# Altium PCB gimbalPCB.PcbDoc (part 1 of 2)
Units mil, origin at the board's own origin, x right, y up, seen from the top; angles counter-clockwise.
Board outline 2880 x 3030 mil, 2 copper layers (Top Layer, Bottom Layer); 107 components, 57 nets, 327 pads, 91 vias.
Unrouted connection lines stored in the file: 9.
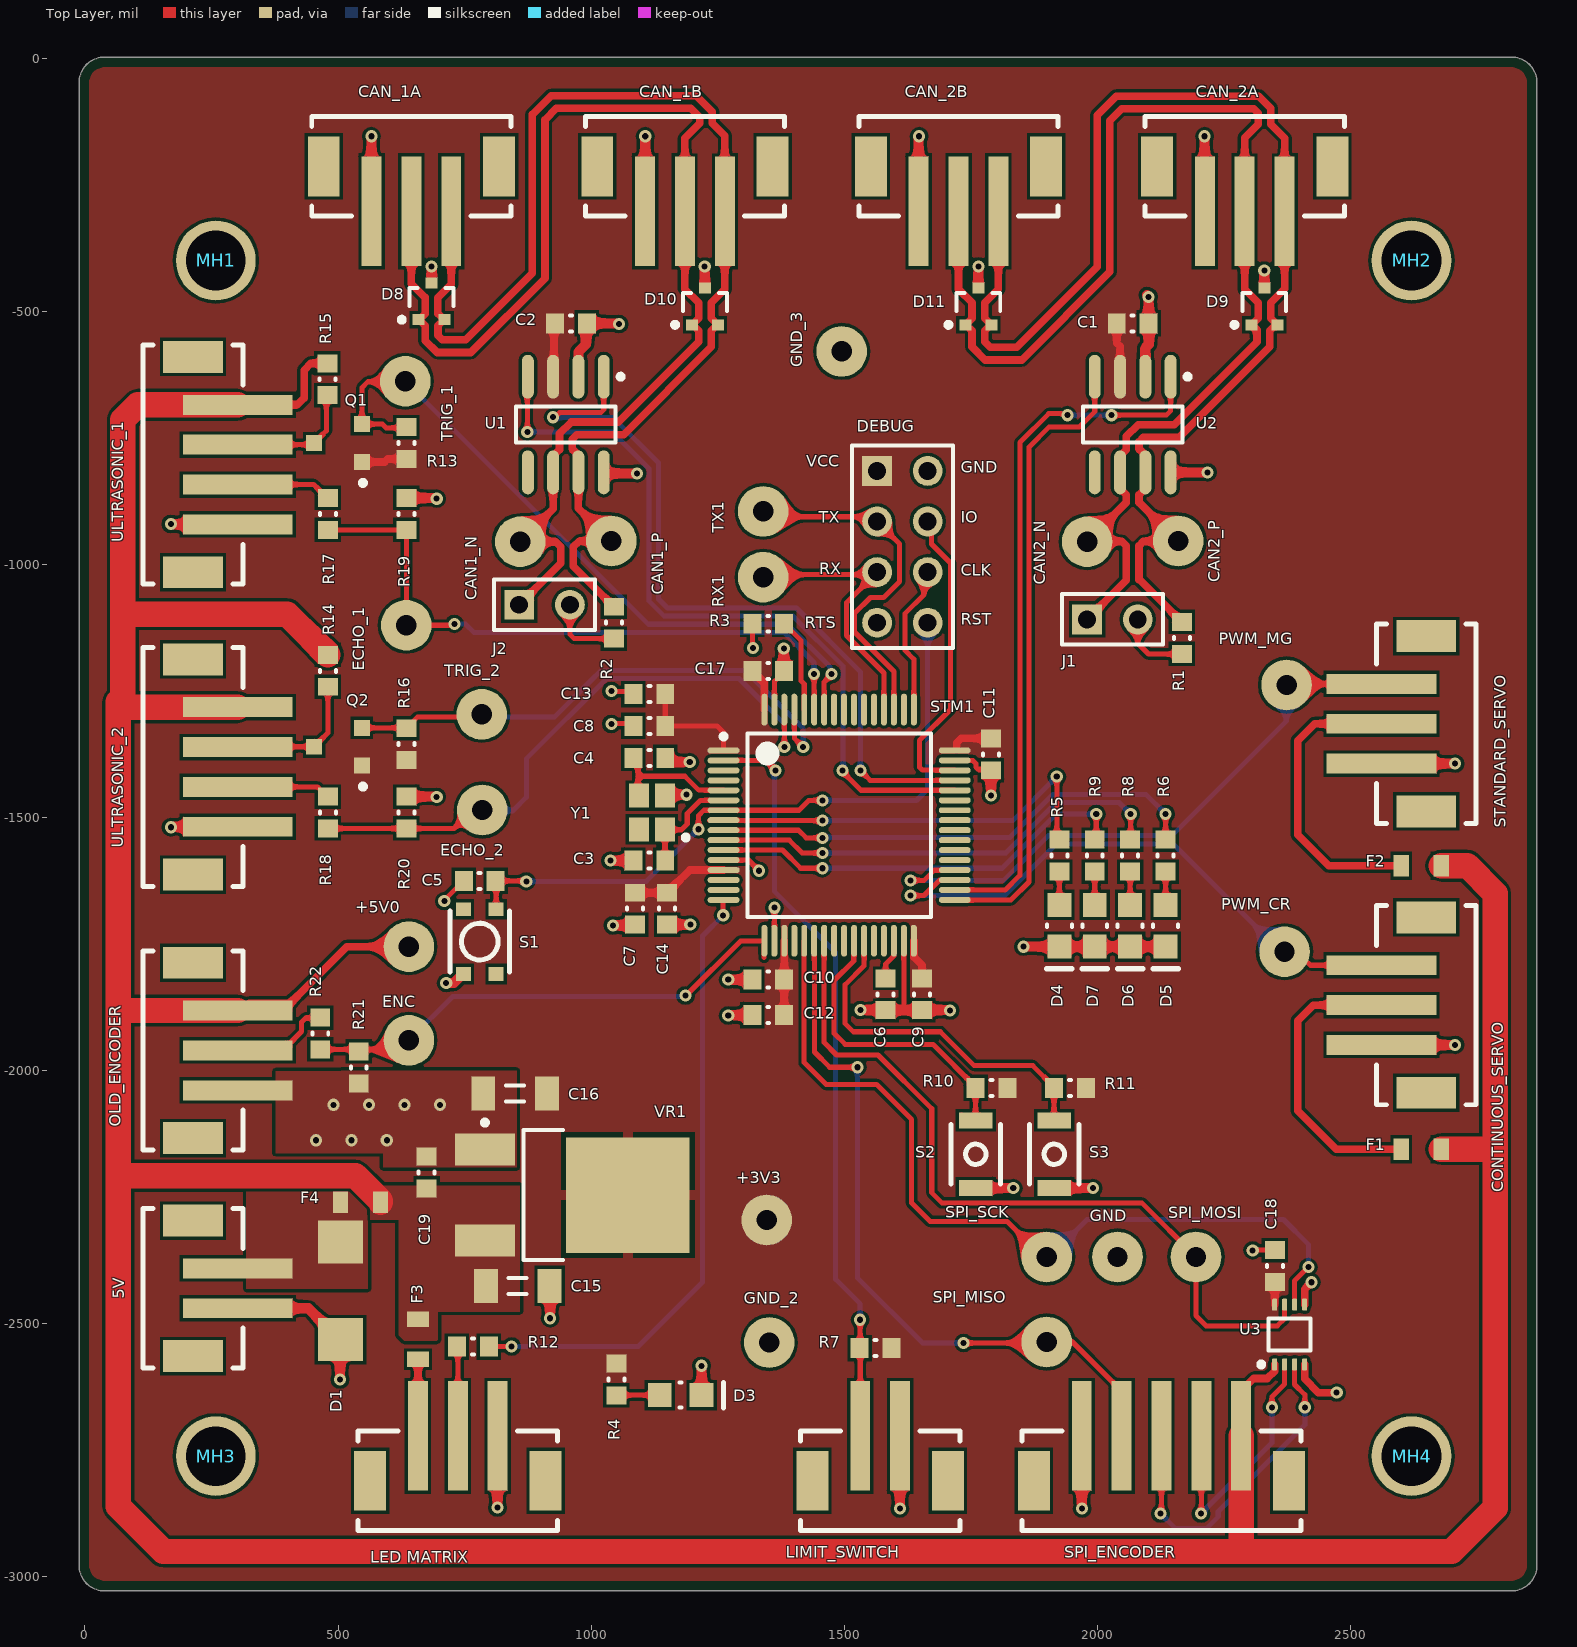
[diagram p0: Top Layer view]
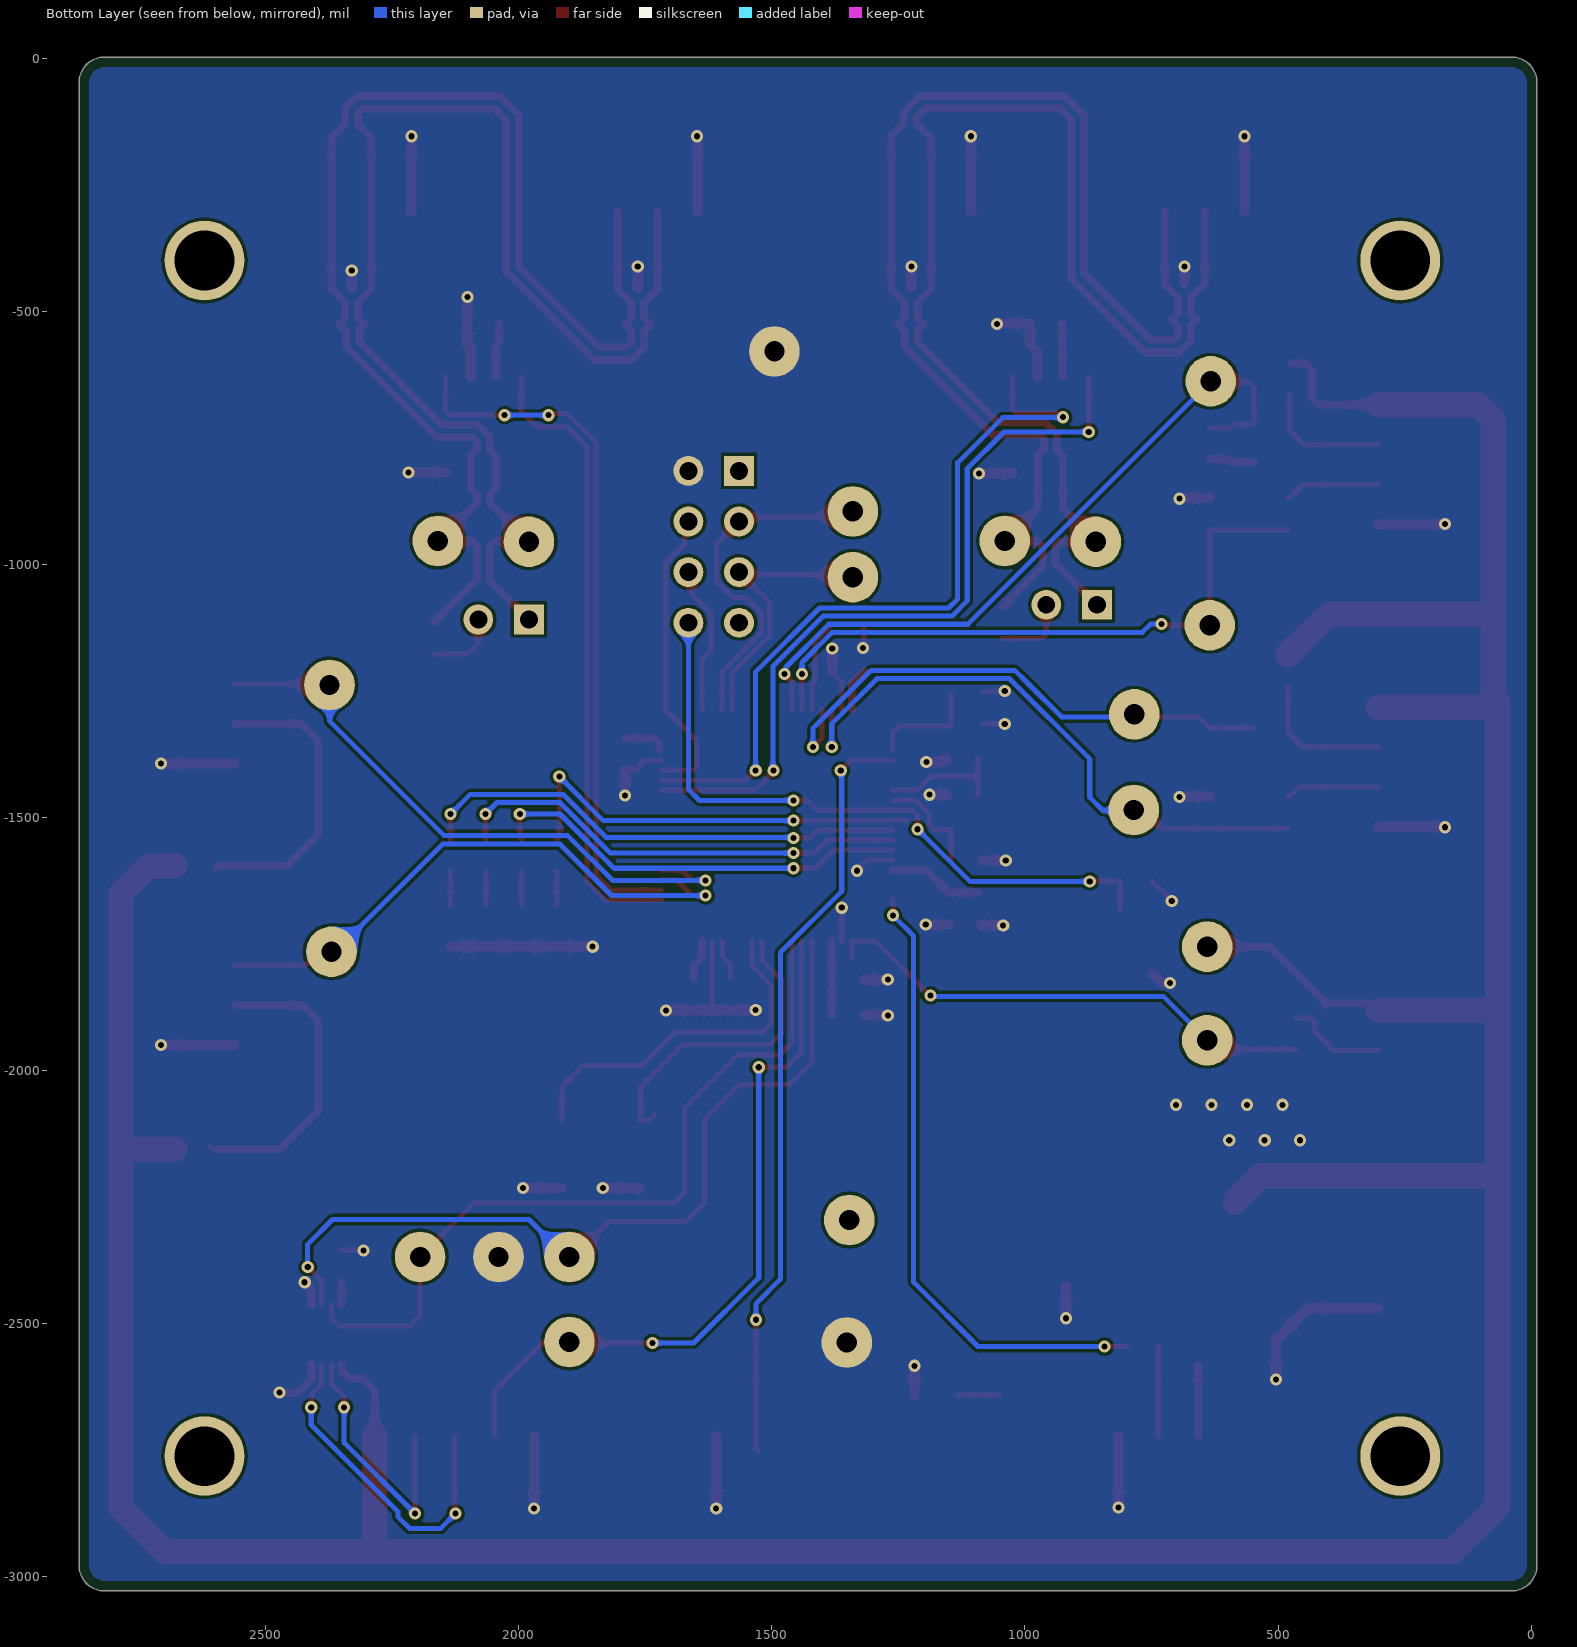
[diagram p1: Bottom Layer view, seen from below]

## Layer stack, top to bottom
Top Solder: solder mask 0.4, Solder Resist, Dk 3.5
Top Layer: signal copper 1.4
Dielectric 1: dielectric 12.6, FR-4, Dk 4.8
Bottom Layer: signal copper 1.4
Bottom Solder: solder mask 0.4, Solder Resist, Dk 3.5

## Board outline
-11.42,-2977.64 ccw(c38.58,-2977.64) 38.58,-3027.64 2818.58,-3027.64 ccw(c2818.58,-2977.64) 2868.58,-2977.64 2868.58,-47.64 ccw(c2818.58,-47.64) 2818.58,2.36 38.58,2.36 ccw(c38.58,-47.64) -11.42,-47.64

## Design rules (kind name [scope] priority, off if disabled: settings)
BoardOutlineClearance [All] p1: gap=20 ignorepadtopadclearanceinfootprint=FALSE
Clearance Clearance_1 [All] p1: gap=6 ignorepadtopadclearanceinfootprint=TRUE
DiffPairsRouting [All] p1: maxlimit=10 minlimit=10 mostfreqgap=10 toplayer_minwidth=15 toplayer_maxwidth=15 toplayer_prefwidth=15 bottomlayer_minwidth=15 bottomlayer_maxwidth=15 bottomlayer_prefwidth=15 maxuncoupledlength=500
HoleSize [All] p1: absolutevalues=TRUE maxlimit=200 minlimit=1 maxpercent=80.000 minpercent=20.000
MinimumSolderMaskSliver [All] p1: minsoldermaskwidth=5
PolygonConnect PolygonConnect_1 [InComponent('VR1') and InNet('+3V3')] p1: connectstyle=Relief reliefconductorwidth=20 reliefentries=4 polygonreliefangle="90 Angle" airgapwidth=10
PolygonConnect [All] p2: connectstyle=Direct reliefconductorwidth=10 reliefentries=4 polygonreliefangle="90 Angle" airgapwidth=10
RoutingVias [All] p1: holewidth=12 width=24 viastyle="Through Hole" minholewidth=12 minwidth=24 maxholewidth=28 maxwidth=50
SilkToSolderMaskClearance [IsPad] p1: minsilkscreentomaskgap=6 clearancetoexposedcopper=TRUE
SolderMaskExpansion [All] p1: expansion=4
Width Width_1 [All] p1: maxlimit=50 minlimit=10 preferedwidth=10 minimp=50.000000 maximp=50.000000 favimp=50.000000
26 further rules are at their usual default settings.

## Classes and differential pairs
component class Sensors: C18 C19 OLD_ENCODER Q1 Q2 R13 R14 R15 R16 R17 R18 R19 R20 R21 R22 SPI_ENCODER SPI_MISO SPI_MOSI SPI_SCK U3 ULTRASONIC_1 ULTRASONIC_2
component class Support: D4 D5 D6 D7 ECHO_1 ECHO_2 ENC GND_2 GND_3 MH1 MH2 MH3 MH4 PWM_CR PWM_MG R5 R6 R8 R9 R10 R11 S2 S3 TRIG_1 TRIG_2
component class POWER: +3V3 +5V0 C15 C16 D3 GND R4 VR1
component class MCU: C3 C4 C5 C6 C7 C8 C9 C10 C11 C12 C13 C14 C17 R3 RX1 S1 STM1 TX1 Y1
component class Connectors: 5V CAN_1A CAN_1B CAN_2A CAN_2B CONTINUOUS_SERVO D1 D8 D9 D10 D11 DEBUG F1 F2 F3 F4 "LED MATRIX" LIMIT_SWITCH R7 R12 STANDARD_SERVO
component class CAN: C1 C2 CAN1_N CAN1_P CAN2_N CAN2_P J1 J2 R1 R2 U1 U2
differential pair CAN2: +CAN2_P -CAN2_N
differential pair CAN1: +CAN1_P -CAN1_N

## Components (designator, comment, footprint, x,y, rotation, side; value= is the part's Value field where it differs from the comment)
5V "CON_2M_SM4" JST-B2B-SM4-TB 115,-2430 r270 top locked
+3V3 "TESTPOINT_LOOP" TESTPOINT_LOOP 1347,-2295 r90 top
+5V0 "TESTPOINT_LOOP" TESTPOINT_LOOP 640,-1755 r90 top
C1 "" CAPC0603(1608)55_N 2070,-523.5 r180 top value="0.1uF 16V"
C2 "" CAPC0603(1608)55_N 960,-523.5 r180 top locked value="0.1uF 16V"
C3 "CAP_15pF_0603" CAPC0603(1608)55_N 1115,-1585 r0 top value=15pF
C4 "CAP_15pF_0603" CAPC0603(1608)55_N 1115,-1382 r180 top value=15pF
C5 "CAP_0.1uF_16V_0603" CAPC0603(1608)55_N 780,-1625 r0 top value=0.1uF
C6 "CAP_4.7uF_0603" CAPC0603(1608)55_N 1582,-1849 r90 top value=4.7uF
C7 "CAP_1uF_16V_0603" CAPC0603(1608)55_N 1087,-1680 r90 top value=1uF
C8 "CAP_0.1uF_16V_0603" CAPC0603(1608)55_N 1115,-1319 r0 top value=0.1uF
C9 "CAP_0.1uF_16V_0603" CAPC0603(1608)55_N 1654,-1849 r90 top value=0.1uF
C10 "CAP_0.1uF_16V_0603" CAPC0603(1608)55_N 1350,-1820 r0 top value=0.1uF
C11 "CAP_0.1uF_16V_0603" CAPC0603(1608)55_N 1790,-1375 r90 top locked value=0.1uF
C12 "CAP_4.7uF_0603" CAPC0603(1608)55_N 1350,-1890 r0 top value=4.7uF
C13 "CAP_0.1uF_16V_0603" CAPC0603(1608)55_N 1115,-1256 r0 top value=0.1uF
C14 "CAP_10nF_0603" CAPC0603(1608)55_N 1150,-1680 r90 top value=10nF
C15 "10uF" CAPC1206(3216) 855,-2425 r180 top
C16 "10uF" CAPC1206(3216) 850,-2045 r0 top
C17 "CAP_0.1uF_16V_0603" CAPC0603(1608)55_N 1350,-1210 r180 top value=0.1uF
C18 "CAP_0.1uF_50V_0603" CAPC0603(1608)55_N 2351,-2386 r270 top value=0.1uF
C19 "CAP_0.1uF_50V_0603" CAPC0603(1608)55_N 675,-2201 r270 top value=0.1uF
CAN1_N "TESTPOINT_LOOP" TESTPOINT_LOOP 860,-955 r0 top
CAN1_P "TESTPOINT_LOOP" TESTPOINT_LOOP 1040,-953.5 r0 top locked
CAN2_N "TESTPOINT_LOOP" TESTPOINT_LOOP 1980,-955 r0 top
CAN2_P "TESTPOINT_LOOP" TESTPOINT_LOOP 2160,-953.5 r0 top locked
CAN_1A "CON_3M_SM4" JST-B3B-SM4-TB 645,-115 r180 top locked
CAN_1B "CON_3M_SM4" JST-B3B-SM4-TB 1185.42,-115 r180 top locked
CAN_2A "CON_3M_SM4" JST-B3B-SM4-TB 2291.26,-115 r180 top locked
CAN_2B "CON_3M_SM4" JST-B3B-SM4-TB 1725.84,-115 r180 top locked
CONTINUOUS_SERVO "CON_3M_SM4" JST-B3B-SM4-TB 2748.43,-1870.42 r90 top locked
D1 "TVS_DIODE_BIDIRECTIONAL" TVS_DIODE_BIDIRECTIONAL 505,-2435 r270 top
D3 "DIO_LED_G" LED_0805_LINE 1177,-2641 r0 top
D4 "DIO_LED_G" LED_0805_LINE 1925,-1713.66 r270 top
D5 "DIO_LED_G" LED_0805_LINE 2135,-1713.66 r270 top
D6 "DIO_LED_G" LED_0805_LINE 2065,-1713.66 r270 top
D7 "DIO_LED_G" LED_0805_LINE 1995,-1713.66 r270 top
D8 "TVS_DIODE_CAN" NXP-SOT323-3 685,-480 r90 top
D9 "TVS_DIODE_CAN" NXP-SOT323-3 2330,-490 r90 top locked
D10 "TVS_DIODE_CAN" NXP-SOT323-3 1225,-490 r90 top locked
D11 "TVS_DIODE_CAN" NXP-SOT323-3 1765,-490 r90 top locked
DEBUG "HEADER 4X2" HEADER_2X4 1565,-815 r270 top locked
ECHO_1 "TESTPOINT_LOOP" TESTPOINT_LOOP 635,-1120 r270 top
ECHO_2 "TESTPOINT_LOOP" TESTPOINT_LOOP 785,-1485 r270 top locked
ENC "TESTPOINT_LOOP" TESTPOINT_LOOP 640,-1940 r270 top
F1 "FUSE_1.5A_0603" FUSE_0603 2640,-2155 r0 top
F2 "FUSE_5A_0603" FUSE_0603 2640,-1595 r0 top
F3 "FUSE_250mA_0603" FUSE_0603 658,-2530.43 r270 top
F4 "FUSE_2A_0603" FUSE_0603 544.57,-2260 r0 top
GND "TESTPOINT_LOOP" TESTPOINT_LOOP 2040,-2368 r0 top
GND_2 "TESTPOINT_LOOP" TESTPOINT_LOOP 1352,-2537 r90 top
GND_3 "TESTPOINT_LOOP" TESTPOINT_LOOP 1495,-579 r90 top
J1 "JUMPER_2" HDR1X2 1980,-1108.5 r0 top
J2 "JUMPER_2" HDR1X2 858,-1079.5 r0 top locked
"LED MATRIX" "CON_3M_SM4" JST-B3B-SM4-TB 736.77,-2908.43 r0 top
LIMIT_SWITCH "CON_2M_SM4" JST-B2B-SM4-TB 1571.14,-2908.43 r0 top
MH1 "MOUNTING_HOLES" MOUNTING_HOLE#1 248.78,-591.42 r0 top locked
MH2 "MOUNTING_HOLES" MOUNTING_HOLE#2 2682.83,-427.05 r0 top locked
MH3 "MOUNTING_HOLES" MOUNTING_HOLE#3 265.51,-2405.39 r0 top locked
MH4 "MOUNTING_HOLES" MOUNTING_HOLE#4 3239.14,-2955.53 r0 top locked
OLD_ENCODER "CON_3M" JST-B3B-SM4-TB 115,-1960 r270 top locked
PWM_CR "TESTPOINT_LOOP" TESTPOINT_LOOP 2370,-1765 r0 top locked
PWM_MG "TESTPOINT_LOOP" TESTPOINT_LOOP 2374,-1238 r0 top
Q1 "NMOS_20V_6A" NMOS_SOT23-3 500,-760 r90 top locked
Q2 "NMOS_20V_6A" NMOS_SOT23-3 500,-1360 r90 top locked
R1 "" RESC0603(1608)_N 2167,-1145 r270 top value=120R
R2 "" RESC0603(1608)_N 1045,-1115 r270 top value=120R
R3 "RES_10K_0603" RESC0603(1608)_N 1350,-1117 r180 top value=10K
R4 "RES_100R_0603" RESC0603(1608)_N 1050,-2610 r90 top value=100R
R5 "RES_100R_0603" RESC0603(1608)_N 1925,-1575 r270 top value=100R
R6 "RES_100R_0603" RESC0603(1608)_N 2135,-1575 r270 top value=100R
R7 "RES_10K_0603" RESC0603(1608)_N 1562,-2548 r0 top value=10K
R8 "RES_100R_0603" RESC0603(1608)_N 2065,-1575 r270 top value=100R
R9 "RES_100R_0603" RESC0603(1608)_N 1995,-1575 r270 top value=100R
R10 "RES_10K_0603" RESC0603(1608)_N 1791,-2034 r180 top value=10K
R11 "RES_10K_0603" RESC0603(1608)_N 1946,-2034 r0 top value=10K
R12 "470R 1%" RESC0603(1608)_N 766.5,-2545 r180 top value=470R
R13 "RES_10K_0603" RESC0603(1608)_N 635,-760 r90 top locked value=10K
R14 "RES_10K_0603" RESC0603(1608)_N 480,-1210 r90 top locked value=10K
R15 "RES_10K_0603" RESC0603(1608)_N 479,-634 r90 top value=10K
R16 "RES_10K_0603" RESC0603(1608)_N 635,-1355 r90 top value=10K
R17 "RES_3K3_0603" RESC0603(1608)_N 480,-900 r90 top locked value=3K3
R18 "RES_3K3_0603" RESC0603(1608)_N 480,-1490 r90 top locked value=3K3
R19 "RES_2K2_0603" RESC0603(1608)_N 635,-900 r270 top locked value=2K2
R20 "RES_2K2_0603" RESC0603(1608)_N 635,-1490 r270 top value=2K2
R21 "RES_3K3_0603" RESC0603(1608)_N 541,-1993.5 r270 top value=3K3
R22 "RES_2K2_0603" RESC0603(1608)_N 465,-1926.5 r90 top value=2K2
RX1 "TESTPOINT_LOOP" TESTPOINT_LOOP 1340,-1025 r90 top locked
S1 "SW_PWR" PTS830GM140 780,-1745 r90 top
S2 "SW_TACTILE" B3U-1100P 1760,-2165 r270 top locked
S3 "SW_TACTILE" B3U-1100P 1915,-2165 r270 top locked
SPI_ENCODER "CON_5M_SM4" JST-B5B-SM4-TB 2126.81,-2908.43 r0 top locked
SPI_MISO "TESTPOINT_LOOP" TESTPOINT_LOOP 1900,-2536 r90 top
SPI_MOSI "TESTPOINT_LOOP" TESTPOINT_LOOP 2195,-2368 r90 top
SPI_SCK "TESTPOINT_LOOP" TESTPOINT_LOOP 1900,-2368 r90 top
STANDARD_SERVO "CON_3M_SM4" JST-B3B-SM4-TB 2748.43,-1314.58 r90 top locked
STM1 "STM32F446RET6" STM-LQFP64_L 1490,-1515 r0 top locked
TRIG_1 "TESTPOINT_LOOP" TESTPOINT_LOOP 633,-638 r270 top
TRIG_2 "TESTPOINT_LOOP" TESTPOINT_LOOP 784,-1296 r270 top locked
TX1 "TESTPOINT_LOOP" TESTPOINT_LOOP 1340,-895 r90 top locked
U1 "LTC2875IS8#PBF" LT-S8_N 950,-723.5 r270 top locked
U2 "LTC2875IS8#PBF" LT-S8_N 2070,-723.5 r270 top locked
U3 "SN74LVC2T45DCURG4" DCU0008A_L 2380,-2521.28 r90 top
ULTRASONIC_1 "PH TOP SMD" JST-B4B-SM4-TB 115,-802.6 r270 top locked
ULTRASONIC_2 "PH TOP SMD" JST-B4B-SM4-TB 115,-1400 r270 top locked
VR1 "5V0_3V3_LDO" VOLTAGE_REGULATOR 900,-2245.69 r270 top
Y1 "CRYSTAL_32MHZ" AVX-CX2520DB32000D0GEJZ1-4_V 1120.06,-1490 r180 top

## Footprints (in the part's own frame and the unit in brackets; to place one, negate y for a bottom-side part, rotate by r counter-clockwise, add the part's x,y. Pads: shape width x height; smd on the part's side, far side on the other; paste and mask are expansions set on the pad)
AVX-CX2520DB32000D0GEJZ1-4_V [mm] "Hand Drawn, 4-Leads,Body 2.5x2mm"
  rect 1x1.2 smd: 1(-0.65,0.85) 2(-0.65,-0.85) 3(0.65,-0.85) 4(0.65,0.85)
  silkscreen extent -1.83,1.13 -1.58,1.38, body extent -1,-1.25 1,1.25, height 0.55
B3U-1100P [mm] "TACTILE SWITCH GREY"
  rect 0.8x1.7 smd: 1(-1.7,0) 2(1.7,0)
  silkscreen extent -1.5,-1.25 1.5,1.25, body extent -2,-1.25 2,1.25, height 1.6
CAPC0603(1608)55_N [mm] "Chip Capacitor, Body 1.6x0.8mm, Height 0.55mm, IPC Medium Density"
  rect 0.9x1 smd: 1(-0.8,0) 2(0.8,0)
  silkscreen extent -0.05,-0.4 0.05,0.4, body extent -0.87,-0.48 0.88,0.47, height 0.55
CAPC1206(3216) [mm] "Chip Capacitor, Body 3.2x1.6mm, Height 0.55mm, IPC Medium Density"
  rect 1.2x1.7 smd: 1(-1.6,0) 2(1.6,0)
  silkscreen extent -0.45,-0.4 0.45,0.4, body extent -1.6,-0.85 1.6,0.85, height 1.75
DCU0008A_L [mm] "SOP, 8-Leads, Body 2.4x2.1mm, Pitch 0.5mm, IPC High Density"
  rrect40% 0.6x0.25 smd: 1(-1.5,0.75) 2(-1.5,0.25) 3(-1.5,-0.25) 4(-1.5,-0.75) 5(1.5,-0.75) 6(1.5,-0.25) 7(1.5,0.25) 8(1.5,0.75)
  silkscreen extent -1.62,-1.05 0.8,1.55, body extent -1.56,-1 1.56,1, height 0.9
FUSE_0603 [mm] "Chip Fuse, Body 1.6x0.81mm"
  rect 0.762x1.09 smd: 1(-1.005,0) 2(1.005,0)
  body extent -0.8,-0.38 0.8,0.38, height 0.75
HDR1X2 [mm] "Connector; Header; 2 Position"
  rect 1.5x1.5 hole 0.9: 1(0,0)
  round 1.5 hole 0.9: 2(2.54,0)
  silkscreen extent -1.27,-1.27 3.81,1.27, body extent -1.27,-1.27 3.81,1.27, height 6.35
HEADER_2X4 [mm]
  rect 1.5x1.5 hole 0.9: 1(0,0)
  round 1.5 hole 0.9: 2(2.54,0) 3(5.08,0) 4(7.62,0) 5(0,2.54) 6(2.54,2.54) 7(5.08,2.54) 8(7.62,2.54)
  silkscreen extent -1.27,-1.27 8.89,3.81, body extent -1.36,-1.32 8.8,3.67, height 8.54
JST-B2B-SM4-TB [mm]
  rect 1x5.5 smd: 1(-1,4.75) 2(1,4.75)
  rect 1.6x3 smd: 3(-3.4,2.5) 4(3.4,2.5)
  silkscreen extent -4,0 4,5, body extent -3.97,0 3.97,7, height 6.6
JST-B3B-SM4-TB [mm]
  rect 1x5.5 smd: 1(-2,4.75) 2(0,4.75) 3(2,4.75)
  rect 1.6x3 smd: 4(-4.4,2.5) 5(4.4,2.5)
  silkscreen extent -5,0 5,5, body extent -4.97,0 4.97,7, height 6.6
JST-B4B-SM4-TB [mm]
  rect 1x5.5 smd: 1(-3,4.75) 2(-1,4.75) 3(1,4.75) 4(3,4.75)
  rect 1.6x3 smd: 5(-5.4,2.5) 6(5.4,2.5)
  silkscreen extent -6,0 6,5, body extent -5.98,0 5.98,7, height 6.6
JST-B5B-SM4-TB [mm]
  rect 1x5.5 smd: 1(-4,4.75) 2(-2,4.75) 3(0,4.75) 4(2,4.75) 5(4,4.75)
  rect 1.6x3 smd: 6(-6.4,2.5) 7(6.4,2.5)
  silkscreen extent -7,0 7,5, body extent -6.98,0 6.98,7, height 6.6
LED_0805_LINE [mm] "SMD, 2-Leads, Body 2x1.25mm"
  rect 1.2x1.2 smd: 1(-1.05,0) 2(1.05,0)
  silkscreen extent -0.05,-0.64 2.16,0.64, body extent -1,-0.63 1,0.63, height 0.8
LT-S8_N [mm] "SOP, 8-Leads, Body 4.9x3.9mm, Pitch 1.27mm, IPC Medium Density"
  oval 2.2x0.6 smd: 1(-2.4,1.905) 2(-2.4,0.635) 3(-2.4,-0.635) 4(-2.4,-1.905) 5(2.4,-1.905) 6(2.4,-0.635) 7(2.4,0.635) 8(2.4,1.905)
  silkscreen extent -2.52,-2.5 0.9,2.88, body extent -2,-2.5 2,2.5, height 1.76
MOUNTING_HOLE#1 [mm]
  round 4 hole 3 unplated mask+0.102: 0(0.25,4.88)
MOUNTING_HOLE#2 [mm]
  round 4 hole 3 unplated mask+0.102: 0(-1.575,0.705)
MOUNTING_HOLE#3 [mm]
  round 4 hole 3 unplated mask+0.102: 0(-0.175,-9.045)
MOUNTING_HOLE#4 [mm]
  round 4 hole 3 unplated mask+0.102: 0(-15.705,4.929)
NMOS_SOT23-3 [mm] "SOT23, 3 pins, Body 2.90mm x 2.80mm"
  rect 0.8x0.8 smd: 1(-0.95,-1.2) 2(0.95,-1.2) 3(0,1.2)
  silkscreen extent -2.12,-1.38 -1.88,-1.13, body extent -1.46,-1.25 1.46,1.23, height 1
NXP-SOT323-3 [mm] "SOT23, 3-Leads, Body 2.2x1.35mm, Pitch 0.65mm"
  rect 0.55x0.6 smd paste-1: 1(-0.925,0.65) 2(-0.925,-0.65) 3(0.925,0)
  silkscreen extent -1.05,-1.1 0.67,1.62, body extent -1.15,-1.1 1.15,1.1, height 1.1
PTS830GM140 [mm] "PWR TACTILE SWITCH (RED)"
  rect 0.7x0.75 smd: 1(-1.625,0.825) 2(1.625,0.825) 3(-1.625,-0.825) 4(1.625,-0.825)
  silkscreen extent -1.53,-1.5 1.53,1.5, body extent -1.75,-1.3 1.75,1.3, height 1.35
RESC0603(1608)_N [mm] "Chip Resistor, Body 1.6x0.8mm, IPC Medium Density"
  rect 0.9x1 smd: 1(-0.8,0) 2(0.8,0)
  silkscreen extent -0.05,-0.4 0.05,0.4, body extent -0.85,-0.47 0.85,0.47, height 0.6
STM-LQFP64_L [mm] "QFP, 64-Leads, Body 10x10mm, Pitch 0.5mm, IPC High Density"
  oval 1.6x0.3 smd: 1(-5.8,3.75) 2(-5.8,3.25) 3(-5.8,2.75) 4(-5.8,2.25) 5(-5.8,1.75) 6(-5.8,1.25) 7(-5.8,0.75) 8(-5.8,0.25) 9(-5.8,-0.25) 10(-5.8,-0.75) 11(-5.8,-1.25) 12(-5.8,-1.75) 13(-5.8,-2.25) 14(-5.8,-2.75) 15(-5.8,-3.25) 16(-5.8,-3.75) 33(5.8,-3.75) 34(5.8,-3.25) 35(5.8,-2.75) 36(5.8,-2.25) 37(5.8,-1.75) 38(5.8,-1.25) 39(5.8,-0.75) 40(5.8,-0.25) 41(5.8,0.25) 42(5.8,0.75) 43(5.8,1.25) 44(5.8,1.75) 45(5.8,2.25) 46(5.8,2.75) 47(5.8,3.25) 48(5.8,3.75)
  oval 0.3x1.6 smd: 17(-3.75,-5.8) 18(-3.25,-5.8) 19(-2.75,-5.8) 20(-2.25,-5.8) 21(-1.75,-5.8) 22(-1.25,-5.8) 23(-0.75,-5.8) 24(-0.25,-5.8) 25(0.25,-5.8) 26(0.75,-5.8) 27(1.25,-5.8) 28(1.75,-5.8) 29(2.25,-5.8) 30(2.75,-5.8) 31(3.25,-5.8) 32(3.75,-5.8) 49(3.75,5.8) 50(3.25,5.8) 51(2.75,5.8) 52(2.25,5.8) 53(1.75,5.8) 54(1.25,5.8) 55(0.75,5.8) 56(0.25,5.8) 57(-0.25,5.8) 58(-0.75,5.8) 59(-1.25,5.8) 60(-1.75,5.8) 61(-2.25,5.8) 62(-2.75,5.8) 63(-3.25,5.8) 64(-3.75,5.8)
  silkscreen extent -5.92,-4.6 4.6,4.6, body extent -5,-5 5,5, height 1.6
TESTPOINT_LOOP [mm]
  round 2.54 hole 1.02: 1(0,0)
  body extent -1.27,-1.27 1.27,1.27, height 4.57
TVS_DIODE_BIDIRECTIONAL [mm]
  rect 2.16x2.26 smd: 1(-2.45,0) 2(2.45,0)
  body extent -2.7,-1.8 2.7,1.8, height 2.27
VOLTAGE_REGULATOR [mm] "DPAK, 3-Leads, Body 6.095x6.54mm, Pitch 4.57mm"
  rect 1.6x3 smd: 1(-2.285,-2.79) 3(2.285,-2.79)
  rect 5.8x6.2 smd: 2(0,4.39)
  silkscreen extent -3.76,-2.91 3.27,1.14, body extent -3.27,-0.84 3.27,5.25, height 2.38

## Part data
5V LIMIT_SWITCH: Manufacturer=JST, Manufacturer Part Number=B2B-PH-SM4-TB(LF)(SN), Max Current Rating=2A, Max Voltage Rating=100V, Supplier Part Number 1=455-1734-1-ND, ComponentLink1Description=https://datasheet.ciiva.com/11748/0900766b80ddea81-11748001.pdf?src-supplier=RSComponents, ComponentLink1URL=https://datasheet.ciiva.com/11748/0900766b80ddea81-11748001.pdf?src-supplier=RSComponents, ComponentLink2Description=https://datasheet.ciiva.com/16216/b2b-ph-sm4-tblfsn-16216102.pdf?src-supplier=Future+Electronics, ComponentLink2URL=https://datasheet.ciiva.com/16216/b2b-ph-sm4-tblfsn-16216102.pdf?src-supplier=Future+Electronics, ComponentLink3Description=https://datasheet.ciiva.com/8052/80567-8052023.pdf?src-supplier=Element14, ComponentLink3URL=https://datasheet.ciiva.com/8052/80567-8052023.pdf?src-supplier=Element14, ComponentLink4Description=https://datasheet.ciiva.com/712/eph-712504.pdf?src-supplier=Digi-Key, ComponentLink4URL=https://datasheet.ciiva.com/712/eph-712504.pdf?src-supplier=Digi-Key, ComponentLink5Description=https://datasheet.ciiva.com/712/eph-712505.pdf?src-supplier=Digi-Key, ComponentLink5URL=https://datasheet.ciiva.com/712/eph-712505.pdf?src-supplier=Digi-Key, ComponentLink6Description=https://datasheet.ciiva.com/712/eph-712506.pdf?src-supplier=Digi-Key, ComponentLink6URL=https://datasheet.ciiva.com/712/eph-712506.pdf?src-supplier=Digi-Key, Pitch=2mm, Supplier 1=Digi-Key
+3V3 +5V0 CAN1_N CAN1_P CAN2_N CAN2_P ECHO_1 ECHO_2 ENC GND GND_2 GND_3 PWM_CR PWM_MG RX1 SPI_MISO SPI_MOSI SPI_SCK TRIG_1 TRIG_2 TX1: "Loop testpoint through-hole pad", Manufacturer="Keystone Electronics", Manufacturer Part Number 1=5002, Supplier Part Number 1=36-5002-ND, Supplier 1=Digi-Key
C1 C2: library part CAP_0.1uF_16V_0603, "CAP CER 0.1UF 16V X7R 0603", Digikey Part Number=311-1088-1-ND, Manufacturer=Yageo, MPN=CC0603KRX7R7BB104, Package="0603 (1608 Metric)", Temperature Coefficient=X7R, Voltage Rating=16V, Dimensions="0.063\" L x 0.031\" W (1.60mm x 0.80mm)"
C3 C4: "CAP CER 15PF 250V NPO 0603", Manufacturer=Yageo, MPN=AC0603JRNPOYBN150, Package="0603 (1608 Metric)", Supplier Part Number 1=311-3282-1-ND, Temperature Coefficient=NP0, Voltage Rating=250V, Dimensions="0.063\" L x 0.031\" W (1.60mm x 0.80mm)", Supplier 1=Digi-Key
C5 C8 C9 C10 C11 C13 C17: "CAP CER 0.1UF 16V X7R 0603", Manufacturer=Yageo, MPN=CC0603KRX7R7BB104, Package="0603 (1608 Metric)", Supplier Part Number 1=311-1088-1-ND, Temperature Coefficient=X7R, Voltage Rating=16V, Dimensions="0.063\" L x 0.031\" W (1.60mm x 0.80mm)", Supplier 1=Digi-Key
C6 C12: "CAP CER 4.7UF 6.3V X5R 0603", Manufacturer=Yageo, MPN=CC0603KRX5R5BB475, Package="0603 (1608 Metric)", Supplier Part Number 1=311-1521-1-ND, Temperature Coefficient=X5R, Voltage Rating=6.3V, Dimensions="0.063\" L x 0.031\" W (1.60mm x 0.80mm)", Supplier 1=Digi-Key
C7: "CAP CER 1UF 16V Y5V 0603", Manufacturer=Yageo, MPN=CC0603ZRY5V7BB105, Package="0603 (1608 Metric)", Supplier Part Number 1=311-1372-1-ND, Temperature Coefficient=Y5V, Voltage Rating=16V, Dimensions="0.063\" L x 0.031\" W (1.60mm x 0.80mm)", Supplier 1=Digi-Key
C14: "CAP CER 10000PF 16V X7R 0603", Manufacturer=Yageo, MPN=CC0603KRX7R7BB103, Package="0603 (1608 Metric)", Supplier Part Number 1=311-3369-1-ND, Temperature Coefficient=X7R, Voltage Rating=16V, Dimensions="0.063\" L x 0.031\" W (1.60mm x 0.80mm)", Supplier 1=Digi-Key
C15 C16: library part CAP_10uF_50V_1206, "CAP CER 10UF 50V X5R 1206", Manufacturer=Murata, MPN=GRT31CR61H106KE01L, Package="1206 (3216 Metric)", Supplier Part Number 1=490-12456-1-ND, Voltage Rating=50V, Dimensions="0.126\" L x 0.063\" W (3.20mm x 1.6mm)", Supplier 1=Digi-Key
C18 C19: "CAP CER 0.1UF 50V X7R 0603", Manufacturer=Yageo, MPN=CC0603KRX7R9BB104, Package="0603 (1608 Metric)", Supplier Part Number 1=311-1344-1-ND, Temperature Coefficient=X7R, Voltage Rating=50V, Dimensions="0.063\" L x 0.031\" W (1.60mm x 0.80mm)", Supplier 1=Digi-Key
CAN_1A CAN_1B CAN_2A CAN_2B CONTINUOUS_SERVO "LED MATRIX" STANDARD_SERVO: Manufacturer=JST, Manufacturer Part Number=B3B-PH-SM4-TB(LF)(SN), Max Current Rating=2A, Max Voltage Rating=100V, Supplier Part Number 1=455-1735-1-ND, ComponentLink1Description=https://datasheet.ciiva.com/11747/0900766b80ddea81-11747684.pdf?src-supplier=RSComponents, ComponentLink1URL=https://datasheet.ciiva.com/11747/0900766b80ddea81-11747684.pdf?src-supplier=RSComponents, Pitch=2mm, Supplier 1=Digi-Key
D1: "TVS DIODE 5V 9.2V DO214AA", Breakdown Voltage=6.4V, Case/Package=SMB, Clamping Voltage=9.2V, Leakage Current=1.6mA, Manufacturer="Nexperia USA Inc.", Manufacturer 1=Littelfuse, Manufacturer Part Number 1=SMBJ5.0CA, Max Breakdown Voltage=7V, Max Operating Temperature=150°C, Max Power Dissipation=5W, Max Surge Current=65.3A, Min Operating Temperature=-65°C, MPN=PESD2CAN,215, Operating Supply Voltage=5V, Package="SC-70, SOT-323", Package Quantity=3000, Peak Pulse Power=600W, Power Line Protection=No, Supplier Part Number 1=1727-3891-1-ND, Test Current=10mA, ComponentLink1Description=Datasheet, ComponentLink1URL=https://www.littelfuse.com/~/media/electronics/datasheets/tvs_diodes/littelfuse_tvs_diode_smbj_datasheet.pdf.pdf, Composition=Zener, Direction=Bidirectional, Element Configuration=Single, ESD Protection=Yes, Height=0.096inch, Lead Free="Lead Free", Length=0.179inch, Max Reverse Leakage Current=1.6mA, Min Breakdown Voltage=6.4V, Mount="Surface Mount", Number of Bidirectional Channels=1, Number of Channels=1, Number of Elements=1, Number of Pins=2, Packaging="Tape and Reel", Peak Pulse Current=65.3A, Polarity=Bidirectional, Power Dissipation=600W, Pricing 1="1=0.39000, 10=0.31300, 25=0.28640, 100=0.17980, 250=0.17784, 500=0.16650, 1000=0.11322 (USD)", Radiation Hardening=No, REACH SVHC="No SVHC", Reverse Breakdown Voltage=6.4V, Reverse Standoff Voltage=5V, Stock 1=23233, Supplier 1=Digi-Key, Termination=SMD/SMT, Voltage Rating (DC)=5V, Width=0.155inch
D3 D4 D5 D6 D7: "LED GREEN DIFFUSED 0805 SMD", Forward Voltage Drop=2.2V, Manufacturer=OSRAM, MPN="LG R971-KN-1", Package="0805 (2012 Metric)", Supplier Part Number 1=475-1410-1-ND, Supplier 1=Digi-Key
D8 D9 D10 D11: "TVS DIODE 24V 41V SOT323-3", Manufacturer="Nexperia USA Inc.", Manufacturer Part Number=PESD2CAN,215, Package="SC-70, SOT-323", Supplier Part Number 1=1727-3891-1-ND, ComponentLink1Description=Datasheet, ComponentLink1URL=https://assets.nexperia.com/documents/data-sheet/PESD1CAN-U.pdf, Supplier 1=Digi-Key
DEBUG: "Header, 4-Pin Dual row", Manufacturer="Sullins Connector Solutions", MPN=GRPB042VWVN-RC, Supplier Part Number 1=S9015E-04-ND, Supplier 1=Digi-Key
F1: "FUSE SMD 1.5A 32V", Current Rating=1.5A, Supplier Part Number 1=F5702CT-ND, Voltage Rating (AC)=32V, ComponentLink1Description=https://datasheet.ciiva.com/26890/getdatasheetpartid-721713-26890390.pdf?src-supplier=Verical, ComponentLink1URL=https://datasheet.ciiva.com/26890/getdatasheetpartid-721713-26890390.pdf?src-supplier=Verical, ComponentLink2Description=https://datasheet.ciiva.com/7464/467-7464069.pdf?src-supplier=Digi-Key, ComponentLink2URL=https://datasheet.ciiva.com/7464/467-7464069.pdf?src-supplier=Digi-Key, ComponentLink3Description=https://datasheet.ciiva.com/7464/467-7464072.pdf?src-supplier=Digi-Key, ComponentLink3URL=https://datasheet.ciiva.com/7464/467-7464072.pdf?src-supplier=Digi-Key, Mount="Surface Mount", Supplier 1=Digi-Key, Supplier Packaging 1="Cut Tape", Voltage Rating (DC)=32V
F2: "FUSE SMD 5A 32V", Case/Package=0603, Case Code (Metric)=1608, Current Rating=5A, DC Cold Resistance=8.9mR, Manufacturer 1=Littelfuse, Manufacturer Part Number 1=0467005.NR, Max Operating Temperature=90°C, Min Operating Temperature=-55°C, Package Quantity=5000, Power Dissipation=363.5mW, Resistance=9mR, Supplier Part Number 1=F1402CT-ND, Voltage Rating (AC)=32V, Approvals=UL,CSA, Case Code (Imperial)=0603, ComponentLink1Description=https://datasheet.ciiva.com/26923/getdatasheetpartid-763340-26923403.pdf?src-supplier=Verical, ComponentLink1URL=https://datasheet.ciiva.com/26923/getdatasheetpartid-763340-26923403.pdf?src-supplier=Verical, ComponentLink2Description=https://datasheet.ciiva.com/1682/48494-1682052.pdf?src-supplier=Farnell, ComponentLink2URL=https://datasheet.ciiva.com/1682/48494-1682052.pdf?src-supplier=Farnell, ComponentLink3Description=https://datasheet.ciiva.com/299/467-299366.pdf?src-supplier=Digi-Key, ComponentLink3URL=https://datasheet.ciiva.com/299/467-299366.pdf?src-supplier=Digi-Key, ComponentLink4Description=https://datasheet.ciiva.com/1549/48494-1549727.pdf?src-supplier=Element14, ComponentLink4URL=https://datasheet.ciiva.com/1549/48494-1549727.pdf?src-supplier=Element14, ComponentLink5Description=https://datasheet.ciiva.com/299/467-299367.pdf?src-supplier=Digi-Key, ComponentLink5URL=https://datasheet.ciiva.com/299/467-299367.pdf?src-supplier=Digi-Key, ComponentLink6Description=https://datasheet.ciiva.com/299/467-299368.pdf?src-supplier=Digi-Key, ComponentLink6URL=https://datasheet.ciiva.com/299/467-299368.pdf?src-supplier=Digi-Key, ComponentLink7Description=https://datasheet.ciiva.com/16291/467-16291097.pdf?src-supplier=Future+Electronics, ComponentLink7URL=https://datasheet.ciiva.com/16291/467-16291097.pdf?src-supplier=Future+Electronics, Composition="Thin Film", Depth=0.81mm, Fuse Current=5A, Fuse Type="Board Mount (Cartridge Style Excluded)", Height=0.012inch, Lead Free="Lead Free", Length=1.6mm, Mount="Surface Mount", Number of Pins=2, Packaging="Tape and Reel", Pricing 1="1=1.20000, 5=1.16600, 10=1.09100, 50=0.90280, 100=0.75240, 250=0.73360, 500=0.62074, 1000=0.54549 (USD)", Radiation Hardening=No, REACH SVHC=Unknown, RoHS=Yes, Stock 1=10729, Supplier 1=Digi-Key, Voltage Rating (DC)=32V, Width=0.813mm, Working Voltage=32V
F3: "FUSE SMD 250mA 32V", Current Rating=250mA, Supplier Part Number 1=F6020CT-ND, Voltage Rating (AC)=32V, ComponentLink1Description=https://datasheet.ciiva.com/303/467-303396.pdf?src-supplier=Digi-Key, ComponentLink1URL=https://datasheet.ciiva.com/303/467-303396.pdf?src-supplier=Digi-Key, ComponentLink2Description=https://datasheet.ciiva.com/18652/littelfuse-fuse-467-datasheet-pdf-18652490.pdf?src-supplier=Digi-Key, ComponentLink2URL=https://datasheet.ciiva.com/18652/littelfuse-fuse-467-datasheet-pdf-18652490.pdf?src-supplier=Digi-Key, ComponentLink3Description=https://datasheet.ciiva.com/18652/littelfuse-fuse-467-datasheet-pdf-18652491.pdf?src-supplier=Digi-Key, ComponentLink3URL=https://datasheet.ciiva.com/18652/littelfuse-fuse-467-datasheet-pdf-18652491.pdf?src-supplier=Digi-Key, ComponentLink4Description=https://datasheet.ciiva.com/18652/littelfuse-fuse-467-datasheet-pdf-18652492.pdf?src-supplier=Digi-Key, ComponentLink4URL=https://datasheet.ciiva.com/18652/littelfuse-fuse-467-datasheet-pdf-18652492.pdf?src-supplier=Digi-Key, Mount="Surface Mount", Supplier 1=Digi-Key, Supplier Packaging 1="Cut Tape", Voltage Rating (DC)=32V
F4: "FUSE SMD 2A 32V", Current Rating=2A, Supplier Part Number 1=F7132CT-ND, Voltage Rating (AC)=32V, ComponentLink1Description=https://datasheet.ciiva.com/303/467-303400.pdf?src-supplier=Digi-Key, ComponentLink1URL=https://datasheet.ciiva.com/303/467-303400.pdf?src-supplier=Digi-Key, ComponentLink2Description=http://datasheet.octopart.com/0467002.NRHF-Littelfuse-datasheet-32023482.pdf?src-supplier=Future+Electronics, ComponentLink2URL=http://datasheet.octopart.com/0467002.NRHF-Littelfuse-datasheet-32023482.pdf?src-supplier=Future+Electronics, ComponentLink3Description=http://datasheet.octopart.com/0467002.NRHF-Littelfuse-datasheet-136509808.pdf?src-supplier=Future+Electronics, ComponentLink3URL=http://datasheet.octopart.com/0467002.NRHF-Littelfuse-datasheet-136509808.pdf?src-supplier=Future+Electronics, Mount="Surface Mount", Supplier 1=Digi-Key, Supplier Packaging 1="Cut Tape", Voltage Rating (DC)=32V
J1 J2: "HEADER 2X1"
MH1 MH2 MH3 MH4: "6cm x 6cm"
Q1 Q2: "MOSFET N-CH 20V 6A SOT23", Manufacturer="Alpha & Omega", MPN=AO3420, Package="TO-236-3, SC-59, SOT-23-3", Supplier Part Number 1=785-1014-1-ND, ComponentLink1Description=Datasheet, ComponentLink1URL=http://aosmd.com/res/data_sheets/AO3420.pdf, Supplier 1=Digi-Key
R1 R2: library part RES_120R_0603, "RES SMD 120 OHM 5% 1/10W 0603", Digikey Part Number=311-120GRCT-ND, Manufacturer=Yageo, MPN=RC0603JR-07120RL, Package="0603 (1608 Metric)", Tolerance=5%, Dimensions="0.063\" L x 0.031\" W (1.60mm x 0.80mm)"
R3 R7 R10 R11 R13 R14 R15 R16: "RES SMD 10K OHM 5% 1/10W 0603", Manufacturer=Yageo, MPN=RC0603JR-0710KL, Package="0603 (1608 Metric)", Supplier Part Number 1=311-10KGRCT-ND, Tolerance=5%, Dimensions="0.063\" L x 0.031\" W (1.60mm x 0.80mm)", Supplier 1=Digi-Key
R4 R5 R6 R8 R9: "RES SMD 100 OHM 1% 1/10W 0603", Manufacturer=Yageo, MPN=RC0603FR-07100RL, Package="0603 (1608 Metric)", Supplier Part Number 1=311-100HRCT-ND, Tolerance=1%, Dimensions="0.063\" L x 0.031\" W (1.60mm x 0.80mm)", Supplier 1=Digi-Key
R12: library part RES_470R_0603, "RES SMD 470 OHM 1% 1/10W 0603", Manufacturer=Yageo, MPN=AC0603FR-07470RL, Package="0603 (1608 Metric)", Supplier Part Number 1=311-470LDCT-ND, Tolerance=1%, Dimensions="0.063\" L x 0.031\" W (1.60mm x 0.80mm)", Supplier 1=Digi-Key
R17 R18 R21: "RES SMD 3.3K OHM 5% 1/10W 0603", Digikey Part Number=311-3.3KGRCT-ND, Manufacturer=Yageo, MPN=RC0603JR-073K3L, Package="0603 (1608 Metric)", Tolerance=5%, Dimensions="0.063\" L x 0.031\" W (1.60mm x 0.80mm)", Supplier 1=Digi-Key, Supplier Part Number 1=311-3.3KGRCT-ND
R19 R20 R22: "RES SMD 2.2K OHM 1% 1/10W 0603", Manufacturer=Yageo, MPN=RC0603FR-072K2L, Package="0603 (1608 Metric)", Supplier Part Number 1=311-2.20KHRCT-ND, Tolerance=1%, Dimensions="0.063\" L x 0.031\" W (1.60mm x 0.80mm)", Supplier 1=Digi-Key
S1: "Power Switch (Red)", Manufacturer=C&K, MPN="PTS830GM140 SMTR LFS", Supplier Part Number 1=CKN10587CT-ND, ComponentLink1Description=Datasheet, ComponentLink1URL=https://www.ckswitches.com/media/1478/pts830.pdf, Supplier 1=Digi-Key
S2 S3: "Tactile Switch (Grey)", Manufacturer="Omron Electronics Inc-EMC Div", MPN=B3U-1100P, Supplier Part Number 1=SW1021TR-ND, Supplier 1=Digi-Key
SPI_ENCODER: Manufacturer=JST, Manufacturer Part Number=B5B-PH-SM4-TB(LF)(SN), Max Current Rating=2A, Max Voltage Rating=100V, Supplier Part Number 1=455-1737-1-ND, ComponentLink1Description=https://datasheet.ciiva.com/11749/0900766b80ddea81-11749188.pdf?src-supplier=RSComponents, ComponentLink1URL=https://datasheet.ciiva.com/11749/0900766b80ddea81-11749188.pdf?src-supplier=RSComponents, ComponentLink2Description=https://datasheet.ciiva.com/712/eph-712595.pdf?src-supplier=Digi-Key, ComponentLink2URL=https://datasheet.ciiva.com/712/eph-712595.pdf?src-supplier=Digi-Key, ComponentLink3Description=https://datasheet.ciiva.com/712/eph-712596.pdf?src-supplier=Digi-Key, ComponentLink3URL=https://datasheet.ciiva.com/712/eph-712596.pdf?src-supplier=Digi-Key, ComponentLink4Description=https://datasheet.ciiva.com/730/eph-730612.pdf?src-supplier=Digi-Key, ComponentLink4URL=https://datasheet.ciiva.com/730/eph-730612.pdf?src-supplier=Digi-Key, ComponentLink5Description=https://datasheet.ciiva.com/16344/eph-16344920.pdf?src-supplier=Future+Electronics, ComponentLink5URL=https://datasheet.ciiva.com/16344/eph-16344920.pdf?src-supplier=Future+Electronics, Pitch=2mm, Supplier 1=Digi-Key
STM1: library part MCU_STM32F446RET6, "ARM Cortex-M4 32-bit MCU+FPU, 512 KB Flash, 128 KB Internal RAM, 50 I/Os, 64-Pin LQFP, -40 to 85 degC, Tray", I/Os (High Current)=50, Operating Frequency(F) (Processor speed) (MHz)=180, Package Description=LQFP64, Package Reference="64-Pin Low-profile Quad Flat Package, Body 10 x 10 mm, Pitch 0.5 mm", Supply Voltage(Vcc) min (V)=1.7, ComponentLink1Description="Manufacturer URL", ComponentLink1URL=http://www.st.com/, ComponentLink2Description=Datasheet, ComponentLink2URL=http://www.st.com/st-web-ui/static/active/en/resource/technical/document/datasheet/DM00141306.pdf, Core="ARM Cortex-M4", D/A Converter=2, DatasheetVersion="Rev. 6", FLASH Size (Prog) (kB)=512, Internal RAM Size (kB)=128, Mounting Technology="Surface Mount", Packing=Tray
U1 U2: library part LTC2875, "IC TXRX CAN 4MBPS 8SO", Digikey Part Number=LTC2875IS8#PBF-ND, Manufacturer="Linear Technologies", Package="8-SOIC (0.154\", 3.90mm Width)", ComponentLink1Description=Datasheet, ComponentLink1URL=https://www.analog.com/media/en/technical-documentation/data-sheets/2875f.pdf, MPN=LTC2875IS8#PBF
U3: library part CMP-0859-00013-4, "Dual-Bit Dual Supply Transceiver with Configurable Voltage Translation and 3-State Outputs, DCU0008A, LARGE T&R", F @ Nom Voltage(Max)(Mhz)=150, Generic Part Number=SN74LVC2T45, ICC @ Nom Voltage(Max)(mA)=0.004, Manufacturer="Texas Instruments", Operating Temperature Range(C)="-40 to 85", Rating=Military, tpd @ Nom Voltage(Max)(ns)=17.7,10.3,8.3,7.2, Voltage(Nom)(V)=1.8,2.5,3.3,5, 3-State Output=Yes, Bits(#)=2, DatasheetVersion=SCES516J, Input Type=CMOS/TTL, Logic=True, Output Drive (IOL/IOH)(Max)(mA)=32/-32, Output Type=CMOS, PackageReference=DCU0008A, Schmitt Trigger=No, Sub-Family="Dual Supply Translator", Technology Family=LVC, VCC(Max)(V)=5.5, VCC(Min)(V)=1.65
ULTRASONIC_1 ULTRASONIC_2: library part CON_4M_PH_TOP_SMT, "CONN HEADER PH TOP 4POS 2MM SMD", Manufacturer=JST, Part Number=B4B-PH-SM4-TB, ComponentLink1Description=Datasheet, ComponentLink1URL=http://www.jst-mfg.com/product/pdf/eng/ePH.pdf
VR1: "IC REG LINEAR 3.3V 1A DPAK", Current Output=1A, Manufacturer="ON Semiconductor", MPN=NCP1117DT33T5G, Supplier Part Number 1=NCP1117DT33T5GOSCT-ND, Supplier 1=Digi-Key
Y1: "CRYSTAL 32MHZ 8PF SMD", Manufacturer="Kyocera International Inc. Electronic Components", MPN=CX2520DB32000D0GPSC1, Package="4-SMD, No Lead", Supplier Part Number 1=1253-1730-1-ND, ComponentLink1Description=Datasheet, ComponentLink1URL=https://media.digikey.com/pdf/Data%20Sheets/AVX%20PDFs/CX2520DB_USY1M-H1-16428-00_Spec.pdf, Dimensions="0.098\" L x 0.079\" W (2.50mm x 2.00mm)", Supplier 1=Digi-Key

## Via types
v1: diameter 24, hole 12, Top Layer to Bottom Layer, tented both sides, 91 vias

## Nets (pads, with @x,y where several pads share a name; then routed paths per layer and width w, separated by ;. In a path a pad name is that pad's centre, name@x,y a point inside that pad or via, vN(x,y) a via of type N, cw(c..) or ccw(c..) an arc to the next point about the centre after c; other vN are vias at no path point)
+3V3: +3V3.1 C1.2 C2.2 C7.2 C8.2 C9.2 C10.2 C11.2 C12.2 C13.2 C14.2 C16.2 C17.2 C18.2 DEBUG.1 Q1.1 Q2.1 R4.2 R7.2 R10.1 R11.2 R13.1 R16.1 STM1.1 STM1.13 STM1.19 STM1.32 STM1.48 STM1.64 U1.3 U2.3 U3.8 VR1.2 | length 1160.1
  Top Layer w10: C13.2 C8.2 1249,-1319 1261.65,-1331.65 STM1.1
  Top Layer w15: Q1.1 592.6,-797.4 598.5,-791.5 R13.1 ; U1.3 926.65,-627.37 926.65,-525.36 C2.2 ; C7.2@1090.47,-1648.5 C14.2 1151.97,-1648.5 1164.69,-1635.79 1164.69,-1633.82 1194.92,-1603.58 STM1.13 ; C17.2 1318.5,-1211.97 1331.22,-1224.69 1333.19,-1224.69 1342.36,-1233.86 STM1.64 ; C12.2 C10.2 1381.73,-1819.76 STM1.19 ; STM1.32 1637.98,-1743.69 1637.98,-1775.64 1654,-1791.66 C9.2 ; STM1.48@1722.71,-1365.77 1722.71,-1352.29 1731.5,-1343.5 C11.2 ; C1.2 2038.5,-562.5 2045,-569 U2.3 ; U3.8 2350.47,-2418.02 C18.2
+5V0: +5V0.1 C15.2 C19.2 F1.2 F2.2 F3.1 F4.2 OLD_ENCODER.1 R14.2 R15.2 SPI_ENCODER.5 U3.1 ULTRASONIC_1.1 ULTRASONIC_2.1 VR1.3 | length 9091.1
  Top Layer w15: ULTRASONIC_1.1 419.51,-684.49 433,-671 433,-616 446.5,-602.5 R15.2@474,-602.5 ; OLD_ENCODER.1@325,-1866.57 405.43,-1866.57 517,-1755 +5V0.1 ; SPI_ENCODER.5 2284.29,-2632.84 2309.12,-2608 2336,-2608 2350.47,-2593.53 U3.1
  Top Layer w50: 75,-2207.54 534.71,-2207.54 584.13,-2256.97 F4.2 ; 75,-1880 76.26,-1881.26 OLD_ENCODER.1 ; ULTRASONIC_2.1 76.89,-1281.89 75,-1280 ; ULTRASONIC_1.1 104.29,-684.49 75,-713.78 75,-1098 ; R14.2 399.5,-1098 75,-1098 ; SPI_ENCODER.5 2284.29,-2949.29 2285,-2950 ; F1.2 2781,-2155 2786,-2160 ; F2.2 2731,-1595 2786,-1650 2786,-2160 ; 75,-1280 66,-1271 66,-2861 155,-2950 2285,-2950 ; 75,-1280 75,-1098 ; 2285,-2950 2700,-2950 2786,-2864 2786,-2160
\R\S\T\: C5.2 DEBUG.8 S1.4 STM1.7 | length 1330.8
  Top Layer w10: S1.4 812.48,-1625.98 C5.2 871,-1625 v1(872,-1626) ; v1(1212,-1523) 1212,-1496.14 1222.66,-1485.47 STM1.7 1410.53,-1485.47 1430,-1466 v1@1457.32,-1466
  Bottom Layer w10: v1(872,-1626) 1109,-1626 v1(1212,-1523) ; v1(1457,-1466) 1643,-1466 1665,-1444 DEBUG.8
BUTTON_1: R10.2 S2.1 STM1.26 | length 620.9
  Top Layer w10: STM1.26 1519.18,-1743.69 1519.18,-1782.82 1480,-1822 1480,-1926 1502,-1948 1675.47,-1948 1759.5,-2032.03 R10.2 S2.1@1759.5,-2097.57 ; S2.1@1731.54,-2087.32 1742.28,-2098.07 S2.1
BUTTON_2: R11.1 S3.1 STM1.27 | length 709.6
  Top Layer w10: STM1.27 1539.21,-1792.79 1502,-1830 1502,-1907 1518,-1923 1690,-1923 1757,-1990 1872.47,-1990 1914.5,-2032.03 R11.1 1914.5,-2097.57 S3.1
CAN1_N: CAN1_N.1 CAN_1A.2 CAN_1B.2 D8.1 D10.1 J2.1 U1.6 | length 2526.3
  Top Layer w15: CAN_1A.2 645,-445.31 672.24,-472.55 672.24,-504.57 D8.1@660.39,-516.42 ; D8.1 D8.1@660.39,-516.42 ; J2.1 940,-997.5 940,-965 930,-955 CAN1_N.1 925,-890 925,-785.9 937.5,-773.4 937.5,-741.93 960.93,-718.5 1053.74,-718.5 1212.5,-559.74 1212.5,-538.52 1200.39,-526.42 D10.1 1212.29,-513.54 1212.29,-508.03 1212.41,-507.91 1212.41,-482.73 1185.42,-455.73 CAN_1B.2 1185.42,-157.52 1214.38,-128.55 1214.38,-116.13 1197.26,-99 931.36,-99 909,-121.36 909,-434.67 762.51,-581.16 695.93,-581.16 672.5,-557.73 672.5,-528.52 D8.1@660.39,-516.42
CAN1_P: CAN1_P.1 CAN_1A.1 CAN_1B.1 D8.2 D10.2 R2.1 U1.7 | length 2522.5
  Top Layer w15: D8.2 D8.2@709.61,-516.42 ; CAN_1A.1 723.74,-446.57 697.24,-473.07 697.24,-504.05 D8.2@709.61,-516.42 ; R2.1 1043.03,-1083.5 1032.81,-1073.29 1032.81,-1071.32 965,-1003.5 965,-965 976.29,-953.71 1039.79,-953.71 CAN1_P.1 975,-888.5 975,-784.16 962.5,-771.66 962.5,-752.29 971.29,-743.5 1064.1,-743.5 1237.5,-570.1 1237.5,-538.52 D10.2@1249.61,-526.42 ; D10.2 D10.2@1249.61,-526.42 ; D8.2@709.61,-516.42 697.5,-528.52 697.5,-547.37 706.29,-556.16 752.16,-556.16 884,-424.31 884,-111 921,-74 1207.61,-74 1239.38,-105.77 1239.38,-128.38 1264.16,-153.16 CAN_1B.1 1264.16,-456.15 1237.41,-482.9 1237.41,-513.24 1246.28,-522.11 1246.28,-523.09 D10.2@1249.61,-526.42
CAN2_N: CAN2_N.1 CAN_2A.2 CAN_2B.2 D9.1 D11.1 J1.1 U2.6 | length 2577.7
  Top Layer w15: CAN_2B.2 1725.84,-456.15 1752.59,-482.9 1752.59,-513.24 1743.72,-522.11 1743.72,-523.09 D11.1@1740.39,-526.42 ; D11.1 D11.1@1740.39,-526.42 ; J1.1 2057.5,-1031 2057.5,-963.04 2048.71,-954.25 CAN2_N.1@1980.75,-954.25 ; CAN2_N.1 CAN2_N.1@1980.75,-954.25 ; D9.1 D9.1@2305.39,-526.42 ; D11.1@1740.39,-526.42 1752.5,-538.52 1752.5,-570.1 1778.4,-596 1851,-596 2025,-422 2025,-123 2048,-100 2308.9,-100 2317.68,-108.79 2317.68,-130.25 2291.26,-156.68 CAN_2A.2 2291.26,-456.57 2317.76,-483.07 2317.76,-513.07 2308.72,-522.11 2308.72,-523.09 D9.1@2305.39,-526.42 ; CAN2_N.1@1980.75,-954.25 2057.5,-877.5 2057.5,-862.59 2045,-850.09 U2.6 2045,-785.9 2057.5,-773.4 2057.5,-746.93 2080.93,-723.5 2151.87,-723.5 2315.63,-559.74 2315.63,-536.65 D9.1@2305.39,-526.42
CAN2_P: CAN2_P.1 CAN_2A.1 CAN_2B.1 D9.2 D11.2 R1.1 U2.7 | length 2590.5
  Top Layer w15: D11.2 D11.2@1789.61,-526.42 ; CAN_2B.1 1804.58,-455.73 1777.59,-482.73 1777.59,-513.41 1786.28,-522.11 1786.28,-523.09 D11.2@1789.61,-526.42 ; CAN2_P.1 CAN2_P.1@2159.25,-954.25 ; R1.1 2165.03,-1113.5 2154.81,-1103.29 2154.81,-1101.32 2083.5,-1030 2082.5,-1030 2082.5,-963.04 2091.29,-954.25 CAN2_P.1@2159.25,-954.25 ; D9.2@2354.61,-526.42 2351.28,-523.09 2351.28,-522.11 2342.76,-513.59 2342.76,-482.55 2370,-455.31 CAN_2A.1 2370,-157.94 2342.68,-130.62 2342.68,-98.43 2319.25,-75 2037.64,-75 2000,-112.64 2000,-411.64 1840.64,-571 1788.76,-571 1777.5,-559.74 1777.5,-538.52 D11.2@1789.61,-526.42 ; D9.2 2352.26,-529.74 2349.41,-529.74 2340.63,-538.53 2340.63,-570.1 2162.22,-748.5 2091.29,-748.5 2082.5,-757.29 2082.5,-771.66 2095,-784.16 U2.7 2095,-850.09 2082.5,-862.59 2082.5,-877.5 CAN2_P.1@2159.25,-954.25
CAN_RX_1: STM1.44 U1.4 | length 1523.9
  Top Layer w10: v1(874,-738) 874,-630.02 U1.4 ; v1@1497,-1410 1533,-1446 1718.24,-1446 STM1.44
  Bottom Layer w10: v1(874,-738) 1041.53,-738 1114,-810.47 1114,-1071.63 1144.37,-1102 1399,-1102 1498,-1201 1498,-1409 v1@1497,-1410
  other v1: 1497,-1407
CAN_RX_2: STM1.33 U2.4 | length 1248.7
  Top Layer w10: STM1.33 1718.69,-1662.98 STM1.33@1745.56,-1662.98 ; STM1.33@1745.58,-1663 1829,-1663 1864.89,-1627.11 1864.89,-768.11 1905,-728 1965,-728 1995,-698 U2.4
CAN_TX_1: STM1.45 U1.1 | length 1533.6
  Top Layer w10: v1(925,-709) 928.79,-709 937.79,-700 1019.14,-700 1025,-694.14 U1.1 ; v1(1532,-1407) 1551.42,-1426.42 STM1.45
  Bottom Layer w10: v1(925,-709) 926,-710 1044,-710 1133,-799 1133,-1068 1151,-1086 1405.63,-1086 1406.63,-1087 1407,-1087 1532,-1212 v1(1532,-1407)
CAN_TX_2: STM1.34 U2.1 | length 1389.3
  Top Layer w10: STM1.34 1818.05,-1642.95 1847,-1614 1847,-759 1904,-702 1928.14,-702 1928.46,-702.32 1938.32,-702.32 v1(1941,-705) ; v1(2028,-705) 2136.21,-705 2145,-696.21 U2.1
  Bottom Layer w10: v1(1941,-705) v1(2028,-705)
ENC_GIMB: ENC.1 R21.1 R22.1 STM1.17 | length 1007.5
  Top Layer w10: R22.1 534.5,-1957.99 536.5,-1956 539,-1958.5 597.14,-1958.5 615.65,-1940 ENC.1 ENC.1@641.39,-1938.61 ; v1(1186.5,-1851.5) 1187.5,-1851.5 1294,-1745 ; 1293,-1746 1294,-1745 ; 1342.02,-1775.98 1342.02,-1743.69 STM1.17 1295.65,-1743.35 1294,-1745
  Bottom Layer w10: ENC.1 727,-1853 1188,-1853 v1(1186.5,-1851.5)
GND: 5V.2 "LED MATRIX.3" C1.1 C2.1 C3.1 C4.1 C5.1 C6.1 C7.1 C8.1 C9.1 C10.1 C11.1 C12.1 C13.1 C14.1 C15.1 C16.1 C17.1 C18.1 C19.1 CAN_1A.3 CAN_1B.3 CAN_2A.3 CAN_2B.3 CONTINUOUS_SERVO.1 D1.2 D3.2 D4.2 D5.2 D6.2 D7.2 D8.3 D9.3 D10.3 D11.3 DEBUG.5 GND.1 GND_2.1 GND_3.1 LIMIT_SWITCH.2 OLD_ENCODER.3 R3.2 R19.1 R20.1 R21.2 S1.1 S2.2 S3.2 SPI_ENCODER.1 STANDARD_SERVO.1 STM1.12 STM1.18 STM1.31 STM1.47 STM1.63 U1.2 U1.8 U2.2 U2.8 U3.4 U3.5 ULTRASONIC_1.4 ULTRASONIC_2.4 VR1.1 Y1.2 | length 4651.6
  Top Layer w10: v1(710,-1665) 710,-1663.5 733.82,-1639.69 735.79,-1639.69 748.5,-1626.97 C5.1 ; v1(1040,-1315) 1041,-1314 C8.1@1083.5,-1314 ; v1(1040,-1250) 1041,-1251 C13.1@1083.5,-1251 ; STM1.12 1310.9,-1583.9 v1(1332,-1605) ; R3.2 1318.5,-1163.5 v1(1320,-1165) ; STM1.18@1362,-1743.3 v1(1362,-1678) ; STM1.63 1362.05,-1230.54 1362.92,-1230.54 1381.5,-1211.97 C17.1 ; 1618,-1875.94 STM1.31@1618,-1743.39 ; STM1.47@1718.69,-1387.39 1754.14,-1387.39 1760,-1393.25 1760,-1400 1765,-1405 C11.1@1788.5,-1405 ; v1(2307,-2355) 2299.99,-2355 2299.5,-2354.5 C18.1
  Top Layer w15: U3.4 2409.53,-2608.53 2437,-2636 v1(2473,-2636) ; U3.5 2409.53,-2431.47 v1(2423,-2418)
  Top Layer w20: v1(170,-1519) 170.89,-1518.11 ULTRASONIC_2.4 ; v1@174,-920 174.7,-920.7 ULTRASONIC_1.4 ; 5V.2 441.38,-2469.37 465.51,-2493.5 465.51,-2493.94 503.03,-2531.46 D1.2 504,-2532.46 v1(504,-2610) ; v1(566,-154) 566,-301.75 CAN_1A.3 ; R20.1 694.5,-1458.5 v1(695,-1459) ; R19.1 693.5,-868.5 v1(695,-870) ; D8.3 v1(685,-411) ; v1(713.76,-1826.88) 728.63,-1826.88 746.54,-1808.98 S1.1 ; v1(815,-2863) 815,-2724.91 817,-2722.91 815.51,-2721.42 ; C15.1 919,-2426.01 v1(919,-2489) ; U1.2 975.2,-628.82 975.2,-579.8 990,-565 990,-525 C2.1 1053.5,-523.5 v1(1055,-525) ; U1.8 1027.01,-820 v1(1091,-820) ; v1(1038,-1585) C3.1@1084.5,-1585 ; v1(1043,-1713) 1085.5,-1713 C7.1 ; CAN_1B.3 1105,-300.33 1107,-298.33 v1(1107,-154) ; C14.1 1195.5,-1711.5 v1(1196,-1711) ; Y1.2@1154.59,-1456.54 1156.39,-1454.74 v1(1188.74,-1454.74) ; C4.1@1155.5,-1382.51 1155.5,-1386.64 1159.21,-1390.36 v1(1194.95,-1390.36) ; v1(1218,-2583) 1218.34,-2583.34 D3.2 ; v1@1224.41,-420.41 1224.41,-452.99 D10.3 ; v1(1271,-1891) 1271.71,-1890.29 C12.1@1317.01,-1890.29 ; v1(1271,-1820) 1271.29,-1820.29 C10.1@1317.01,-1820.29 ; v1(1380.74,-1166.26) 1380.74,-1209.24 C17.1 ; v1(1532,-1880) 1581.5,-1880 C6.1 C9.1 1654.5,-1880 1708,-1880 v1(1709,-1881) ; v1(1610,-2865) 1610,-2721.42 LIMIT_SWITCH.2 ; CAN_2B.3 1647.1,-154.9 v1(1648,-154) ; S2.2@1763.88,-2235.81 S2.2 v1(1834,-2231.93) v1@1834,-2231 ; D11.3 1766,-452.58 1765,-451.58 v1@1765,-420 ; C11.1@1788.5,-1405 C11.1 v1(1790,-1456) ; v1(1854,-1755) D4.2 D7.2 D6.2 D5.2 ; S3.2 1915.07,-2232 v1(1991.5,-2232) v1@1986,-2232 ; SPI_ENCODER.1 1969.33,-2854.33 v1@1970,-2855 ; U2.2 2095,-572 2102,-565 2102,-524.01 C1.1 v1(2101.5,-471.28) v1@2098,-467.79 ; U2.8 v1(2218,-818) ; v1(2212,-154) 2212,-301.49 CAN_2A.3 ; D9.3 v1(2330,-419) ; CONTINUOUS_SERVO.1 2706.84,-1949.16 v1(2707,-1949) ; STANDARD_SERVO.1 v1@2706.32,-1393.32
  other v1: 1970,-2865 456.42,-2137.36 526.42,-2137.36 596.42,-2137.36 491.42,-2067.36 561.42,-2067.36 631.42,-2067.36 701.42,-2067.36 2707,-1393.32 170,-920 1224.41,-411 1765,-411
LED_1: R5.1 STM1.8 | length 848.2
  Top Layer w10: STM1.8@1233.88,-1506.06 STM1.8@1234.67,-1506.06 ; STM1.8@1235.57,-1505.16 STM1.8 1262,-1505.5 1288.87,-1505.5 1289.37,-1506 v1(1457,-1506) ; v1(1920,-1419) 1920,-1538.5 R5.1
  Bottom Layer w10: v1(1457,-1506) 1833,-1506 v1(1920,-1419)
LED_2: R6.1 STM1.9 | length 980.4
  Top Layer w10: STM1.9@1262,-1525.19 STM1.9 1261.81,-1525 1409.93,-1525 1424.93,-1540 v1@1451,-1540 ; R6.1 v1@2135,-1495
  Bottom Layer w10: v1@1451,-1540 1452,-1539 1827.53,-1539 1912.53,-1454 2096,-1454 v1(2135,-1493)
  other v1: 1457,-1540
LED_3: R8.1 STM1.10 | length 916.3
  Top Layer w10: STM1.10@1262,-1544.87 STM1.10 1391.53,-1544.53 1417,-1570 v1(1457,-1570) ; R8.1 2066,-1542.5 v1@2066,-1494
  Bottom Layer w10: v1(1457,-1570) 1819.15,-1570 1919.15,-1470 2043,-1470 v1(2066,-1493)
LED_4: R9.1 STM1.11 | length 847.9
  Top Layer w10: STM1.11@1262,-1564.56 STM1.11 1261.87,-1564 1378,-1564 1414,-1600 v1@1453,-1600 ; R9.1 1998,-1540.5 v1(1998,-1493)
  Bottom Layer w10: v1@1453,-1600 1811.78,-1600 1918.78,-1493 v1(1998,-1493)
  other v1: 1457,-1600
LED_MTRX: R12.1 STM1.16 | length 1248.5
  Top Layer w10: R12.1 v1(843,-2545) ; v1(1261,-1693) 1261,-1662.02 STM1.16
  Bottom Layer w10: v1(843,-2545) 1093,-2545 1220,-2418 1220,-1734 v1(1261,-1693)
LIM_GIMB: LIMIT_SWITCH.1 R7.1 STM1.2 | length 1530.7
  Top Layer w10: STM1.2 1344.05,-1387.05 v1(1364,-1407) ; LIMIT_SWITCH.1@1526.14,-2752.05 1531.77,-2746.42 LIMIT_SWITCH.1 1531.77,-2548 R7.1 1531.5,-2547 v1(1531.5,-2492)
  Bottom Layer w10: v1(1364,-1407) 1362,-1409 1362,-1645.47 1483.21,-1766.68 1483.21,-2412.21 1531.5,-2460.5 v1(1531.5,-2492)
"Net 5V _1": 5V.1 D1.1 F4.1
"Net CONTINUOUS_SERVO _2": CONTINUOUS_SERVO.2 F1.1 | length 593.4
  Top Layer w10: F1.1@2609.43,-2151 F1.1@2610.43,-2150
  Top Layer w15: CONTINUOUS_SERVO.2 2426.58,-1870.42 2396,-1901 2396,-2079 2472,-2155 F1.1
"Net LED MATRIX _2": "LED MATRIX.2" R12.2 | length 177.2
  Top Layer w10: R12.2 736.77,-2546.77 736.77,-2721.42
"Net OLD_ENCODER _2": OLD_ENCODER.2 R22.2 | length 200.8
  Top Layer w10: OLD_ENCODER.2 390.59,-1960 405.28,-1945.32 428,-1922.59 428,-1904.05 436.17,-1895.87 464.13,-1895.87 R22.2
"Net SPI_ENCODER _3": SPI_ENCODER.3 U3.3 | length 669.7
  Top Layer w10: v1(2125,-2875) 2126.81,-2873.19 SPI_ENCODER.3 ; U3.3 2389.84,-2619.84 2410,-2640 v1(2410,-2665)
  Bottom Layer w10: v1(2125,-2875) 2154,-2904 2216,-2904 2239,-2881 2239,-2871 2410,-2700 v1(2410,-2665)
"Net SPI_ENCODER _4": SPI_ENCODER.4 U3.2 | length 516.9
  Top Layer w10: v1(2205,-2875) 2205.55,-2874.45 SPI_ENCODER.4 ; v1(2345,-2665) 2345,-2643.92 2370.16,-2618.76 U3.2
  Bottom Layer w10: v1(2205,-2875) 2345,-2735 v1(2345,-2665)
NetC3_2: C3.2 STM1.6 Y1.1 | length 212
  Top Layer w10: Y1.1 Y1.1@1146,-1523.81 ; C3.2@1146,-1583.5 Y1.1@1146,-1523.81 ; STM1.6 1216.21,-1465.79 1190,-1492 1190,-1512.47 1178.47,-1524 1146.19,-1524 Y1.1@1146,-1523.81
NetC4_2: C4.2 STM1.5 Y1.3 | length 256
  Top Layer w10: C4.2@1092.5,-1382 1092.5,-1418.28 ; Y1.3 1092.5,-1454.57 1092.5,-1418.28 ; STM1.5 1261.31,-1445.76 1212.76,-1445.76 1185.28,-1418.28 1092.5,-1418.28
NetC6_2: C6.2 STM1.30 | length 80.9
  Top Layer w10: C6.2 1582,-1789.43 1597.92,-1773.51 1597.92,-1743.69 STM1.30
NetD3_1: D3.1 R4.1 | length 86.2
  Top Layer w10: R4.1 1050,-2641 D3.1
NetD4_1: D4.1 R5.2 | length 65.8
  Top Layer w10: D4.1 R5.2
NetD5_1: D5.1 R6.2 | length 65.8
  Top Layer w10: D5.1 R6.2
NetD6_1: D6.1 R8.2 | length 65.8
  Top Layer w10: D6.1 R8.2
NetD7_1: D7.1 R9.2 | length 65.8
  Top Layer w10: D7.1 R9.2
NetF2_1: F2.1 STANDARD_SERVO.2 | length 597.4
  Top Layer w10: F2.1@2597.43,-1598 F2.1
  Top Layer w15: STANDARD_SERVO.2 2429.42,-1314.58 2396,-1348 2396,-1534 2457,-1595 2594.43,-1595 F2.1@2597.43,-1598
NetF3_2: "LED MATRIX.1" F3.2 | length 143.1
  Top Layer w10: F3.2@658.03,-2581.1 F3.2@660,-2579.13
  Top Layer w15: 658.03,-2721.42 F3.2@658.03,-2581.1
NetJ1_2: J1.2 R1.2 | length 143.4
  Top Layer w10: J1.2 2080,-1156 2101,-1177 2166.5,-1177 R1.2
NetJ2_2: J2.2 R2.2 | length 149
  Top Layer w10: J2.2 958,-1138 966.5,-1146.5 R2.2
NetR3_1: R3.1 STM1.60 | length 187.2
  Top Layer w10: R3.1 1381.5,-1118.97 1394.21,-1131.69 1396.18,-1131.69 1415,-1150.5 1415,-1230 1421.1,-1236.1 STM1.60
NetR17_2: R17.2 ULTRASONIC_1.3 | length 189.3
  Top Layer w10: ULTRASONIC_1.3 451.97,-841.97 465.31,-855.31 465.31,-855.79 478.03,-868.5 R17.2
NetR18_2: R18.2 ULTRASONIC_2.3 | length 186.2
  Top Layer w10: ULTRASONIC_2.3 459.46,-1439.37 465.31,-1445.23 465.31,-1445.79 478.03,-1458.5 R18.2
PWM_CR: CONTINUOUS_SERVO.3 PWM_CR.1 STM1.35 | length 1172
  Top Layer w10: v1(1631,-1654) 1657.8,-1654 1688.53,-1623.27 STM1.35 ; PWM_CR.1 2394.35,-1765 2417.89,-1788.54 2418.39,-1788.54 2421.53,-1791.68 CONTINUOUS_SERVO.3
  Bottom Layer w10: v1(1631,-1654) 1817,-1654 1919,-1552 2150,-1552 2363,-1765 PWM_CR.1
PWM_MG: PWM_MG.1 STANDARD_SERVO.3 STM1.36 | length 1255.2
  Top Layer w10: v1@1629,-1624 v1(1631,-1624) 1658,-1624 1678.07,-1603.93 1718,-1603.93 STM1.36 ; PWM_MG.1@2380,-1266 2402,-1266 PWM_MG.1@2391.22,-1255.22 ; PWM_MG.1@2387.22,-1232.22 2390.84,-1235.84 STANDARD_SERVO.3
  Bottom Layer w10: v1(1631,-1624) 1815,-1624 1904,-1535 2148,-1535 2373.5,-1309.5 2373.5,-1238.5 PWM_MG.1
SPI1_MISO: SPI_ENCODER.2 SPI_MISO.1 STM1.22 | length 1442.4
  Top Layer w10: STM1.22@1441.13,-1743.84 1441.13,-1963.13 1471.25,-1993.25 v1(1526,-1993.25) ; v1(1736,-2538) 1877,-2538 1885,-2530 1890,-2535 1950.24,-2535 2048.07,-2632.84 SPI_ENCODER.2
  Bottom Layer w10: v1(1526,-1993.25) 1526,-2409 1655,-2538 v1(1736,-2538)
SPI1_MOSI: SPI_MOSI.1 STM1.23 U3.7 | length 1541.1
  Top Layer w10: STM1.23 1460.47,-1944.47 1485,-1969 1567,-1969 1673,-2075 1673,-2241 1693,-2261 2088,-2261 SPI_MOSI.1 2195,-2484 2215,-2504 2355.76,-2504 2370.16,-2489.6 U3.7
SPI1_SCK: SPI_SCK.1 STM1.21 U3.6 | length 1711.4